# Altium PCB relay.PcbDoc
Units mil, origin at the board's own origin, x right, y up, seen from the top; angles counter-clockwise.
Board outline 1250 x 800 mil, 2 copper layers (Top Layer, Bottom Layer); 7 components, 7 nets, 18 pads, 0 vias.
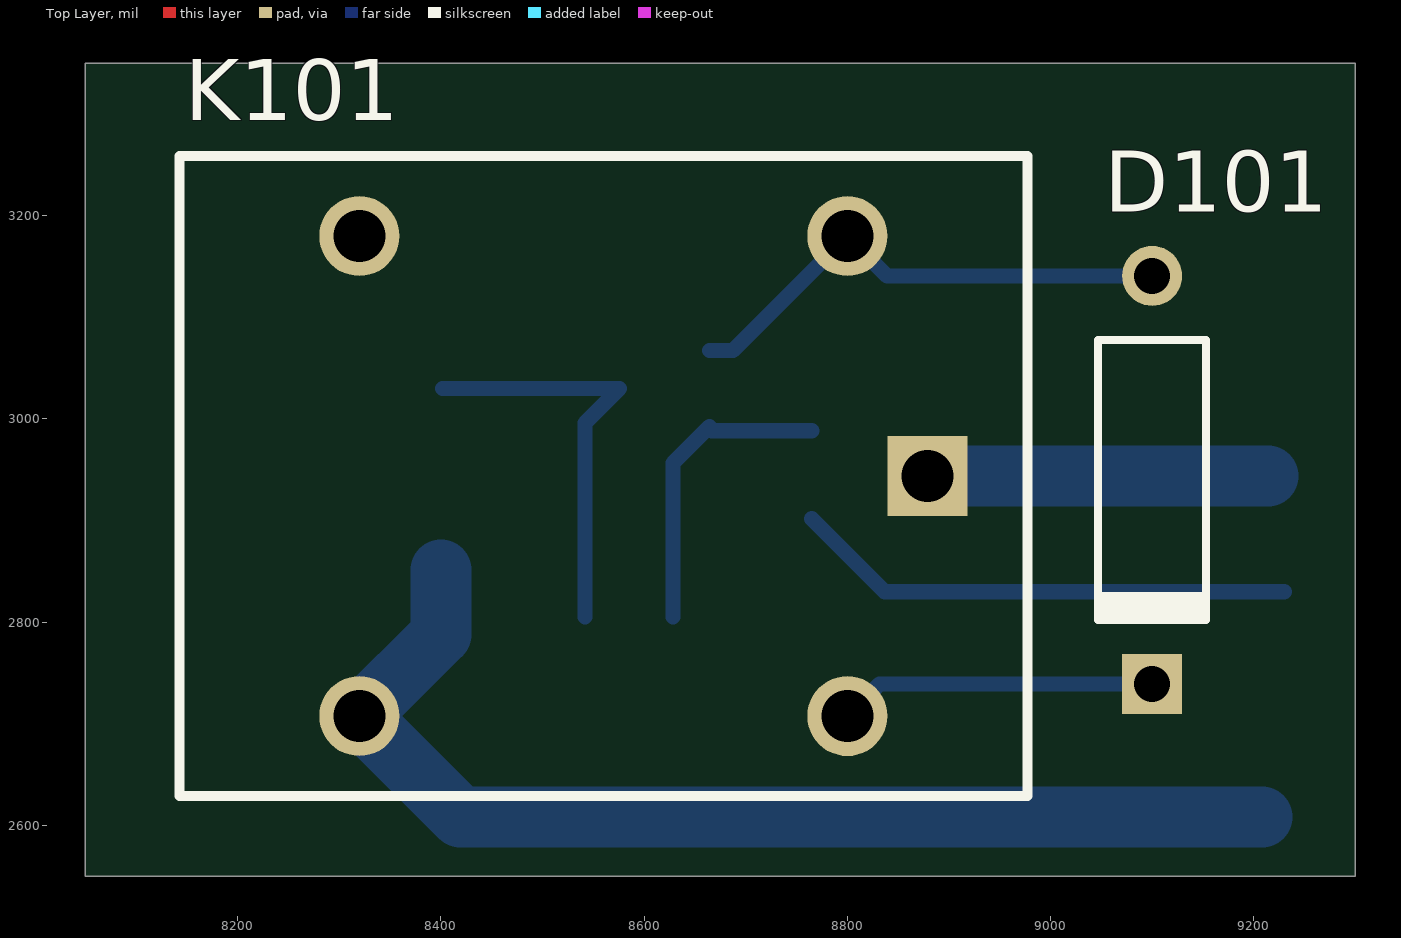
[diagram p0: Top Layer view]
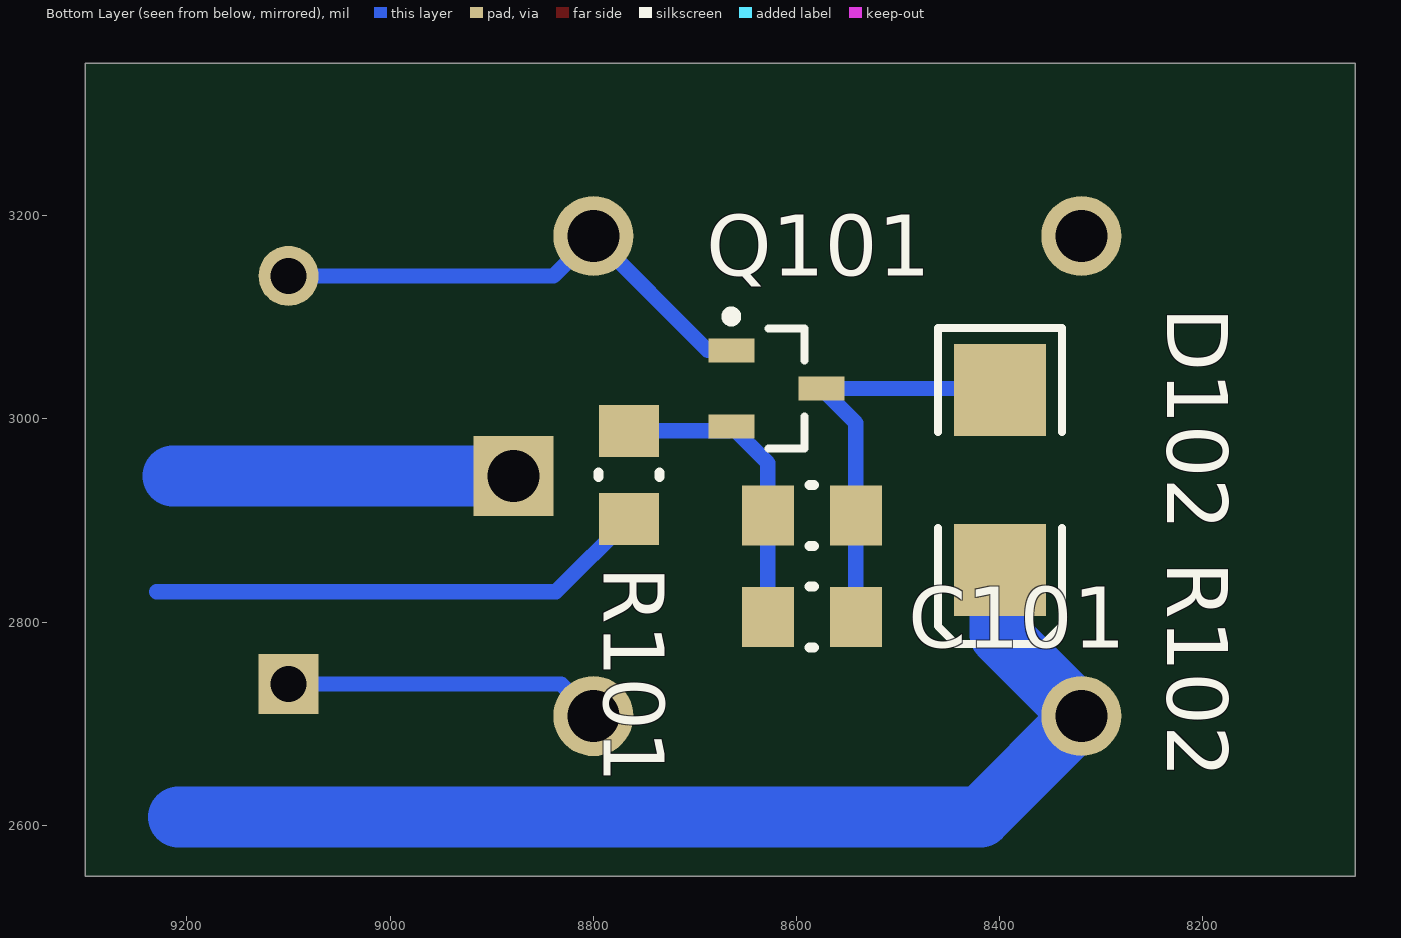
[diagram p1: Bottom Layer view, seen from below]
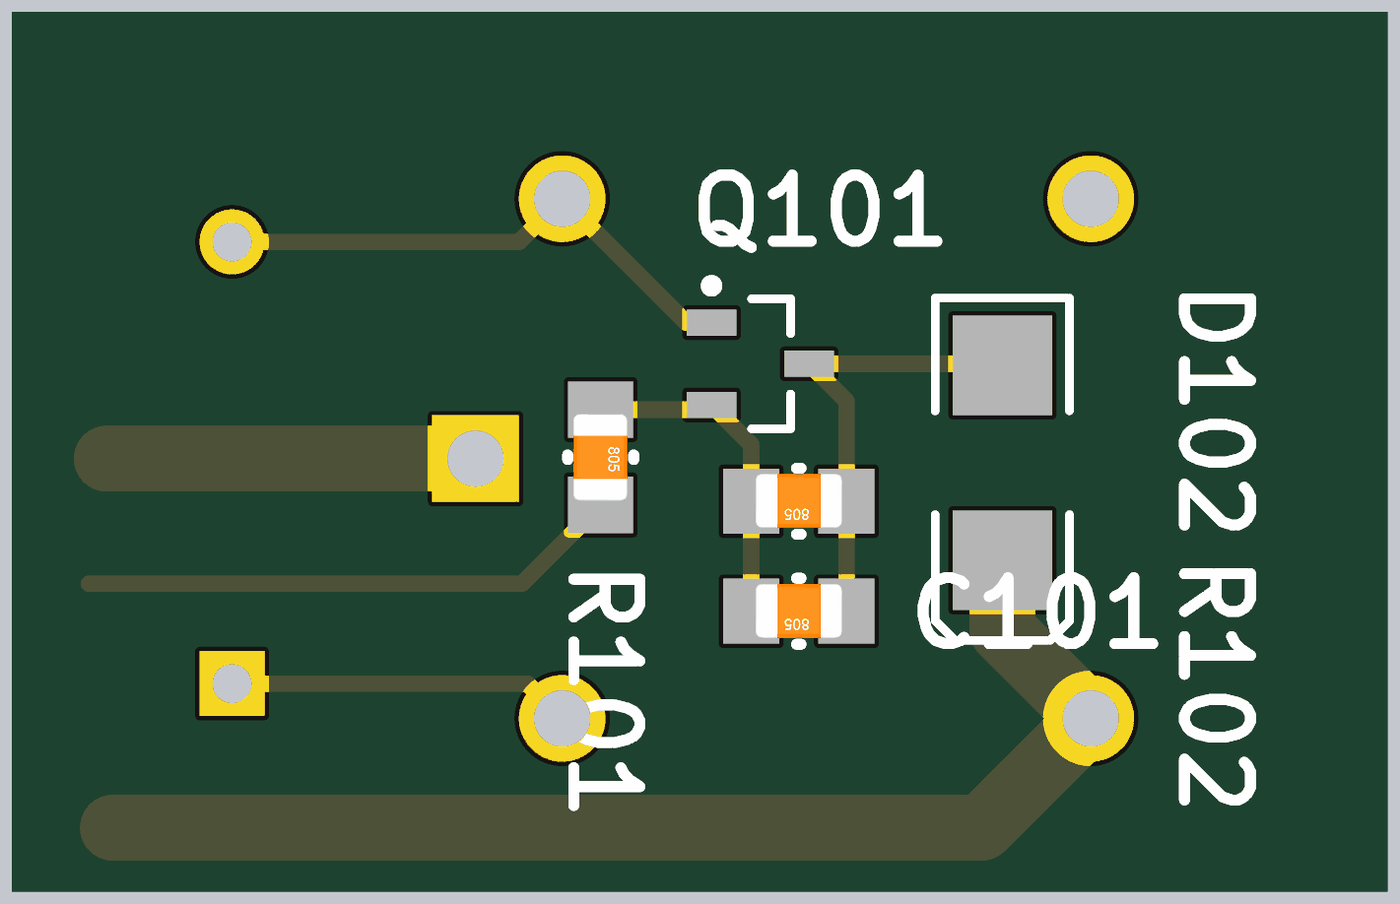
[diagram p2: 3D render of the assembled board from below, using the file's embedded part models]

## Layer stack, top to bottom
Top Layer: signal copper 1.4
Dielectric: dielectric 12.6, FR-4, Dk 4.8
Bottom Layer: signal copper 1.4

## Board outline
8050,3350 8050,2550 9300,2550 9300,3350

## Design rules (kind name [scope] priority, off if disabled: settings)
Clearance [All] p1: gap=30
PolygonConnect [All] p1: connectstyle=Relief reliefconductorwidth=10 reliefentries=4 polygonreliefangle="90 Angle"
RoomDefinition relay [InComponentClass('relay')] p1: confinementstyle=ConfineIn formatcopy=TRUE lockcomponents=FALSE outline 8050,2550 9300,2550 9300,3350 8050,3350
RoutingVias [All] p1: holewidth=28 width=50 viastyle="Through Hole" minholewidth=28 minwidth=50 maxholewidth=28 maxwidth=50
SilkscreenOverComponentPads [All] p1: minsilkscreentomaskgap=10
SolderMaskExpansion [All] p1: expansion=4
Width [All] p1: maxlimit=60 minlimit=15 preferedwidth=30
27 further rules are at their usual default settings.

## Components (designator, comment, footprint, x,y, rotation, side; value= is the part's Value field where it differs from the comment)
C101 "100nF" 0805C 8585,2805 r0 bottom
D101 "MUR120" DIO10.2-7x2.7 9100,2940 r270 top
D102 "MUR120" DSO-C2/X2.3 8400,2940 r270 bottom
K101 "12V/10A" RELE 8878.74,2943.78 r270 top
Q101 "BCV27" SOT95P240-3N 8620,3030 r180 bottom
R101 "0805" 0805C 8765,2945 r270 bottom
R102 "0805" 0805C 8585,2905 r0 bottom

## Footprints (in the part's own frame and the unit in brackets; to place one, negate y for a bottom-side part, rotate by r counter-clockwise, add the part's x,y. Pads: shape width x height; smd on the part's side, far side on the other; paste and mask are expansions set on the pad)
0805C [mm] "Chip Capacitor; Body 2 x 1.3 mm (LxW typ)"
  rect 1.3x1.5 smd: 1(-1.1,0) 2(1.1,0)
  silkscreen extent -0.05,-0.76 0.05,0.76, body extent -1,-0.64 1,0.62, height 0.78
DIO10.2-7x2.7 [mm] "Diode, Axial; Body 7 x 2.7 mm (LxDia. max), Lead Dia. 0.53 mm (max)"
  round 1.5 hole 0.9: 1(-5.1,0)
  rect 1.5x1.5 hole 0.9: 2(5.1,0)
  silkscreen extent -3.5,-1.35 3.6,1.35
DSO-C2/X2.3 [mm] "DO-214-AA/SMB; 2 C-Bend Leads; Body 5.3 x 3.6 mm, inc. leads (LxW)"
  rect 2.3x2.3 smd: 1(-2.25,0) 2(2.25,0)
  silkscreen extent -3.8,-1.55 4.1,1.55
RELE [mm]
  rect 2x2 hole 1.3: 1(0,0)
  round 2 hole 1.3: 2(-6,-14.2) 3(6,-14.2) 4(6,-2) 5(-6,-2)
  silkscreen extent -8,-18.7 8,2.5, body extent -8.01,-18.66 8,2.52, height 15.4
SOT95P240-3N [mm] "SOT23, 3-Leads, Body 2.9x1.3mm, Pitch 0.95mm, Lead Span 2.4mm, IPC Medium Density"
  rect 1.15x0.6 smd: 1(-1.125,0.95) 2(-1.125,-0.95) 3(1.125,0)
  silkscreen extent -1.25,-1.5 0.7,1.92, body extent -0.7,-1.5 0.7,1.5, height 1.14

## Part data
C101: library part Cap, "Capacitor"
D101 D102: library part Diode, "Default Diode"
K101: library part Relay, "SPDT Relay"
Q101: library part NPN1, "NPN Darlington Bipolar Transistor"
R101 R102: library part Res1, "Resistor"

## Nets (pads, with @x,y where several pads share a name; then routed paths per layer and width w, separated by ;. In a path a pad name is that pad's centre, name@x,y a point inside that pad or via, vN(x,y) a via of type N, cw(c..) or ccw(c..) an arc to the next point about the centre after c; other vN are vias at no path point)
+12V: D101.2 K101.4 | length 313.1
  Bottom Layer w15: K101.4 8831.65,2739.21 D101.2
GND: C101.1 D102.1 Q101.3 R102.1 | length 413.4
  Bottom Layer w15: D102.1@8401.42,3030 Q101.3 8541.69,2995.98 R102.1 C101.1
NetC101_2: C101.2 Q101.2 R101.1 R102.2 | length 300.8
  Bottom Layer w15: C101.2 R102.2 8628.31,2956.61 Q101.2 ; Q101.2@8666.69,2988.31 R101.1
NetD101_1: D101.1 K101.5 Q101.1 | length 498.6
  Bottom Layer w15: Q101.1 8687.4,3067.4 K101.5 8839.21,3140.79 D101.1
RL_COM: K101.1 | length 335
  Bottom Layer w60: K101.1 9213.78,2943.78
RL_NO: D102.2 K101.3 | length 1106.8
  Bottom Layer w60: D102.2 8400,2787.87 K101.3 8419.06,2608.19 9208.19,2608.19
RL_TRIGGER: R101.2 | length 494.7
  Bottom Layer w15: R101.2 8836.69,2830 9230,2830
pads on no net: K101.2